# Altium PCB Ultrasonic_Localisation_backup_v1.PcbDoc
Units mm, origin at the board's own origin, x right, y up, seen from the top; angles counter-clockwise.
Board outline 29 x 59 mm, 4 copper layers (Top Layer, MidLayer1, GroundPlane, Bottom Layer); 50 components, 44 nets, 303 pads, 43 vias.
Unrouted connection lines stored in the file: 3.
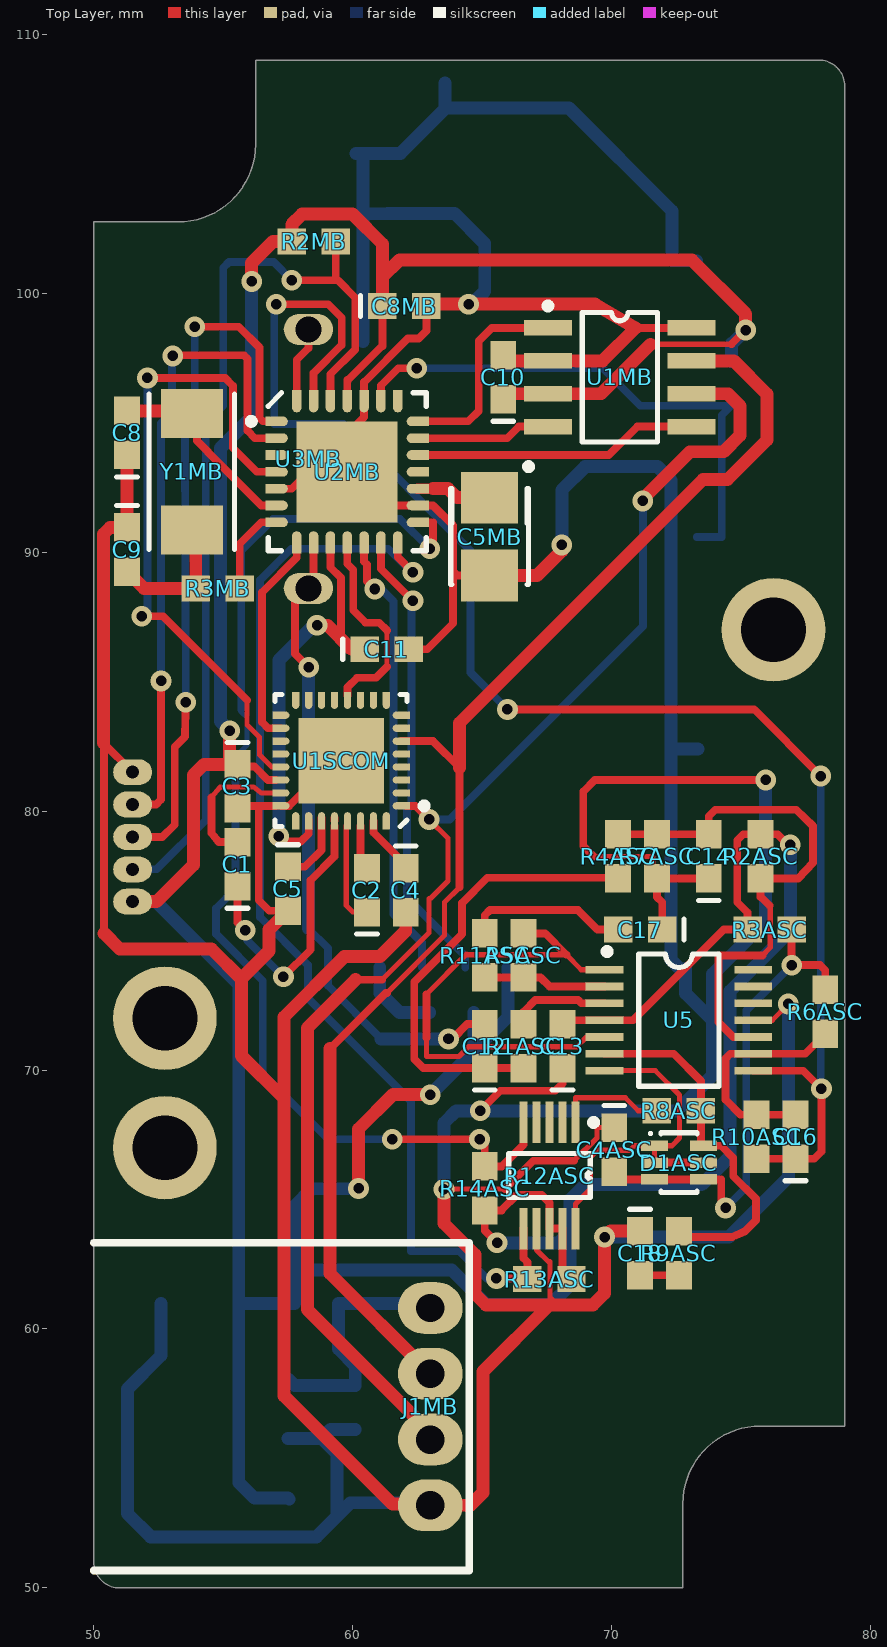
[diagram p0: Top Layer view]
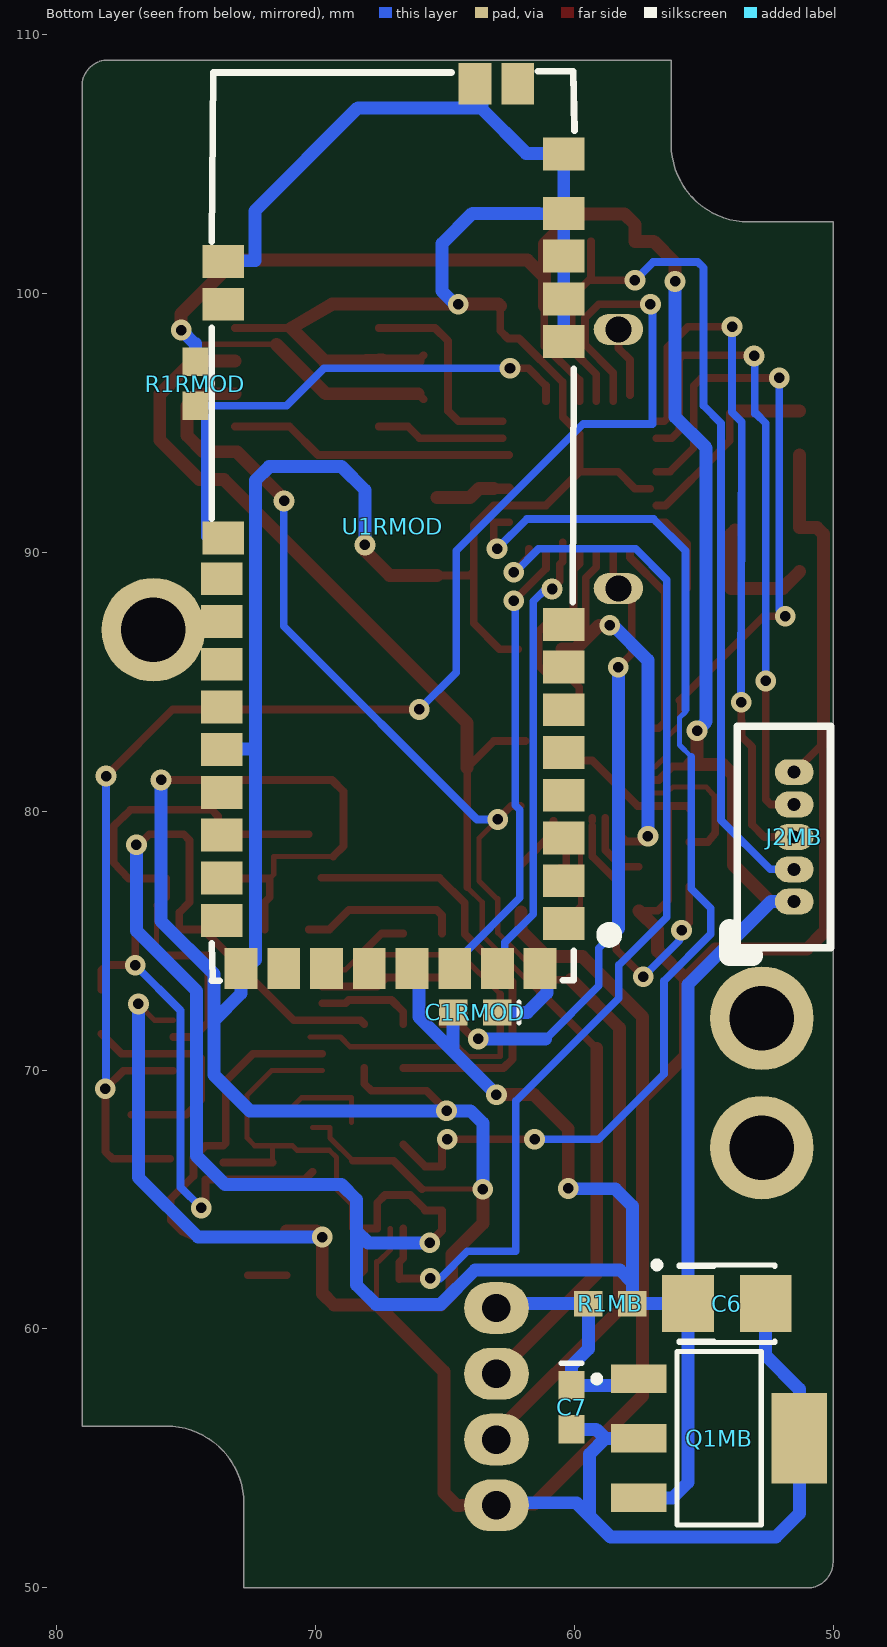
[diagram p1: Bottom Layer view, seen from below]
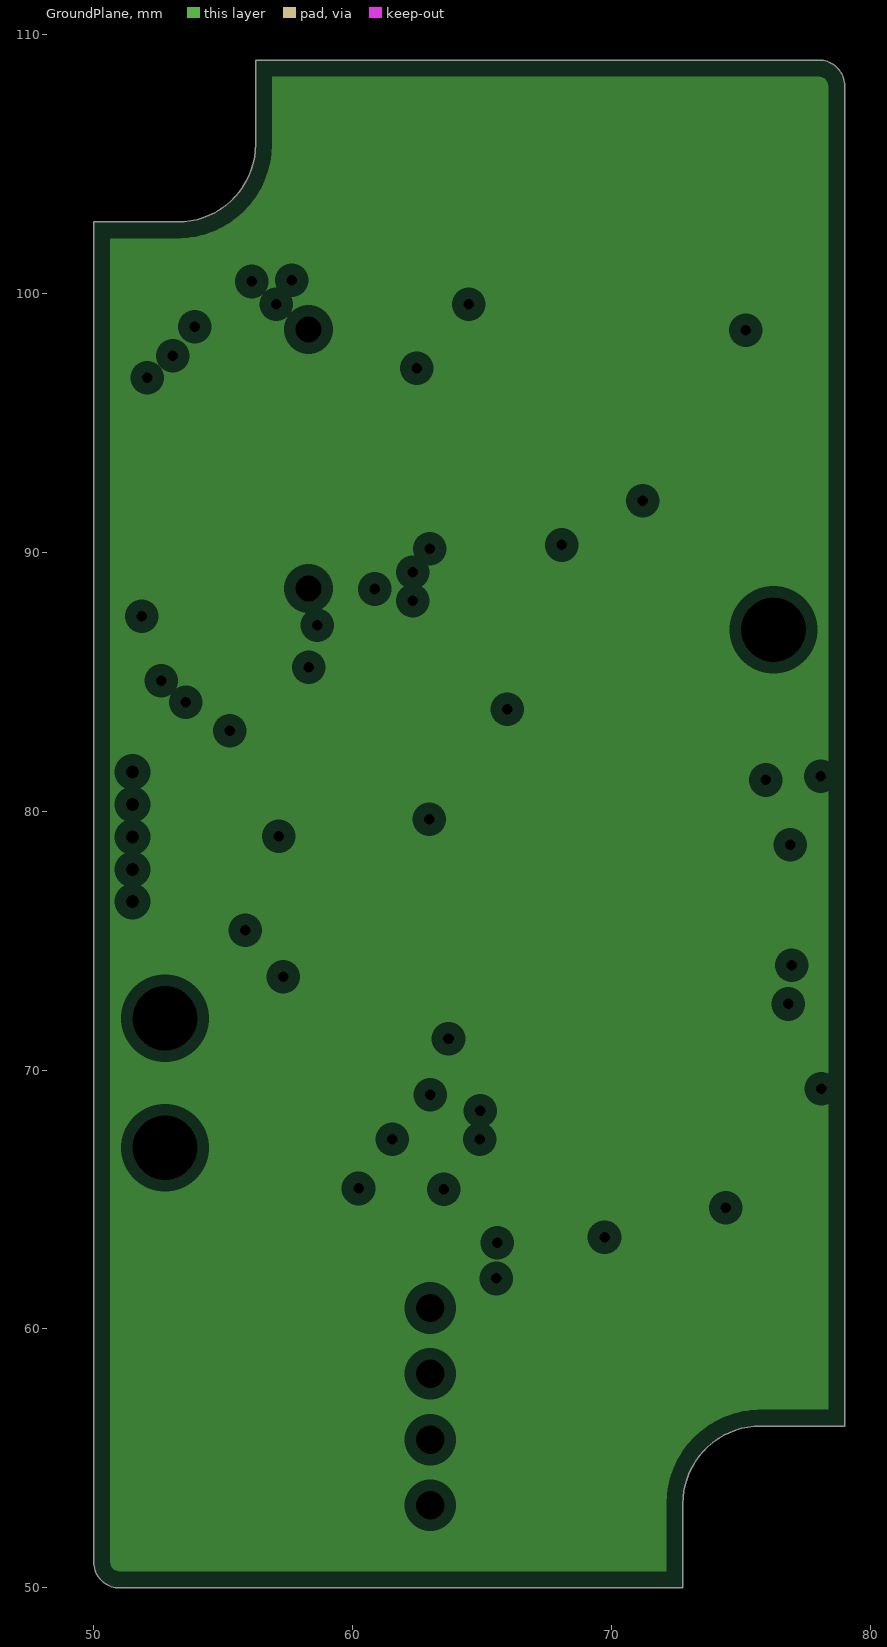
[diagram p2: GroundPlane, clearances drawn from the general rule]

## Layer stack, top to bottom
Top Layer: signal copper 0.036
Dielectric: prepreg 0.32, FR-4, Dk 4.8
MidLayer1: signal copper 0.036
Dielectric: core 0.32, FR-4, Dk 4.8
GroundPlane: plane copper 0.036
Dielectric: prepreg 0.32, FR-4, Dk 4.8
Bottom Layer: signal copper 0.036

## Board outline
50,51 50,102.75 53.25,102.75 ccw(c53.25,105.75) 56.25,105.75 56.25,109 78,109 cw(c78,108) 79,108 79,56.25 75.75,56.25 ccw(c75.75,53.25) 72.75,53.25 72.75,50 51,50 cw(c51,51)

## Design rules (kind name [scope] priority, off if disabled: settings)
Clearance [All] p1: gap=0.152
ComponentClearance [All] p1 off: gap=0.254 collisioncheckmode=3 verticalgap=0.254
HoleSize [All] p1: absolutevalues=TRUE maxlimit=4 minlimit=0.2 maxpercent=80.000 minpercent=20.000
PlaneClearance [All] p1: clearance=0.445
PlaneConnect [All] p1: planeconnectstyle=Direct reliefexpansion=0.508 reliefentries=4 reliefconductorwidth=0.254 reliefairgap=0.254
PolygonConnect [All] p1: connectstyle=Direct reliefconductorwidth=0.254 reliefentries=4 polygonreliefangle="90 Angle"
RoomDefinition S2 [InComponentClass('S2')] p1: confinementstyle=ConfineIn formatcopy=TRUE lockcomponents=FALSE outline 63.55,87.45 53.05,87.45 53.05,72.45 63.55,72.45
RoomDefinition Ultrasonic_Localisation [InComponentClass('Ultrasonic_Localisation')] p2: confinementstyle=ConfineIn formatcopy=TRUE lockcomponents=FALSE outline 47.9,48.25 77.375,48.25 77.375,109.4 47.9,109.4
RoomDefinition S3 [InComponentClass('S3')] p3: confinementstyle=ConfineIn formatcopy=TRUE lockcomponents=FALSE outline 76.625,70.5 57.125,70.5 57.125,111 76.625,111
RoomDefinition S1 [InComponentClass('S1')] p4: confinementstyle=ConfineIn formatcopy=TRUE lockcomponents=FALSE outline 62.375,60.4 78.9,60.4 78.9,80.425 62.375,80.425
RoutingVias [All] p1: holewidth=0.2 width=0.65 viastyle="Through Hole" minholewidth=0.2 minwidth=0.65 maxholewidth=1.5 maxwidth=2.1
ShortCircuit ShortCircuit_Unconnected_Pins [IsPad and not InnetClass('All') vs IsPad and not InnetClass('All')] p1: allowed=TRUE
ShortCircuit [All] p2: allowed=FALSE
SolderMaskExpansion [All] p1: expansion=0.075
TestPointUsage [All] p1: valid=0 allowmultiple=FALSE
Testpoint [All] p1: side=15 testpointundercomponent=TRUE minsize=1.016 maxsize=2.54 preferedsize=1.524 minholesize=0 maxholesize=1.016 preferedholesize=0.813 testpointgrid=0.025 style=1023 order=0123456789
Width [All] p1: maxlimit=3 minlimit=0.152 preferedwidth=0.3 minimp=50.000000 maximp=50.000000 favimp=50.000000
14 further rules are at their usual default settings.

## Classes and differential pairs
component class S3: C1RMOD R1RMOD U1RMOD
component class Ultrasonic_Localisation: C5MB C6 C7 C8 C8MB C9 C10 C11 J1 J1MB J2 J2MB Q1 Q1MB R1 R1MB R2 R2MB R3 R3MB U1 U1MB U2 U2MB U3MB U4 Y1 Y1MB
component class S2: C1 C2 C3 C4 C5 U1SCOM U6
component class S1: C4ASC C12 C13 C14 C15 C16 C17 C18 D1 D1ASC R1ASC R2ASC R3ASC R4 R4ASC R5 R5ASC R6 R6ASC R7 R7ASC R8 R8ASC R9 R9ASC R10 R10ASC R11 R11ASC R12 R12ASC R13 R13ASC R14 R14ASC U5

## Components (designator, comment, footprint, x,y, rotation, side; value= is the part's Value field where it differs from the comment)
C1 "UMK107BJ104KA-T" CC1608-0603 55.55,77.95 r90 top (schematic designator C1SCOM)
C1RMOD "Cap" CC1608-0603 63.825,72.225 r0 bottom
C2 "UMK107BJ104KA-T" CC1608-0603 60.55,76.95 r90 top (schematic designator C2SCOM)
C3 "UMK107BJ104KA-T" CC1608-0603 55.55,80.95 r270 top (schematic designator C3SCOM)
C4 "UMK107BJ104KA-T" CC1608-0603 62.05,76.95 r270 top (schematic designator C4SCOM)
C4ASC "Cap" CC1608-0603 70.1,66.925 r270 top
C5 "UMK107BJ104KA-T" CC1608-0603 57.5,77 r270 top (schematic designator C5SCOM)
C5MB "TPSB106K016R0800" TC3528-1411 65.29,90.6 r270 top
C6 "TPSB106K016R0800" TC3528-1411 54.1,60.975 r180 bottom (schematic designator C1MB)
C7 "UMK107BJ104KA-T" CC1608-0603 60.1,56.975 r270 bottom (schematic designator C2MB)
C8 "Cap" CC1608-0603 51.29,94.6 r90 top (schematic designator C5MB)
C8MB "UMK107BJ104KA-T" CC1608-0603 62,99.5 r0 top
C9 "Cap" CC1608-0603 51.29,90.1 r270 top (schematic designator C6MB)
C10 "UMK107BJ104KA-T" CC1608-0603 65.815,96.75 r90 top (schematic designator C3MB)
C11 "UMK107BJ104KA-T" CC1608-0603 61.315,86.25 r0 top (schematic designator C4MB)
C12 "Cap" CC1608-0603 65.1,70.925 r90 top (schematic designator C1ASC)
C13 "Cap" CC1608-0603 68.1,70.925 r90 top (schematic designator C2ASC)
C14 "Cap" CC1608-0603 73.75,78.25 r90 top (schematic designator C3ASC)
C16 "Cap" CC1608-0603 77.1,67.425 r90 top (schematic designator C5ASC)
C17 "Cap" CC1608-0603 71.1,75.425 r180 top (schematic designator C6ASC)
C18 "Cap" CC1608-0603 71.1,62.925 r270 top (schematic designator C7ASC)
D1ASC "BAV99DW-7-F" SOT-323-6L 72.6,66.425 r270 top
J1MB "70553-0003" CON_CAN_Device-4 63,57 r270 top
J2MB "53048-0510" CON_ISP 51.5,79 r90 bottom
Q1MB "MIC5201-5.0YS" DSO-G3 54.4,55.775 r270 bottom
R1ASC "Res" CR1608-0603 66.6,70.925 r270 top
R1MB "Res" CR1608-0603 58.6,60.975 r0 bottom
R1RMOD "Res" CR1608-0603 74.625,96.5 r90 bottom
R2ASC "Res" CR1608-0603 75.75,78.25 r90 top
R2MB "Res" CR1608-0603 58.5,102 r180 top
R3ASC "Res" CR1608-0603 76.1,75.425 r180 top
R3MB "Res" CR1608-0603 54.79,88.6 r180 top
R4ASC "Res" CR1608-0603 70.25,78.25 r90 top
R5ASC "Res" CR1608-0603 66.6,74.425 r270 top
R6ASC "Res" CR1608-0603 78.25,72.25 r90 top
R7ASC "Res" CR1608-0603 71.75,78.25 r90 top
R8ASC "Res" CR1608-0603 72.6,68.425 r180 top
R9ASC "Res" CR1608-0603 72.6,62.925 r90 top
R10ASC "Res" CR1608-0603 75.6,67.425 r90 top
R11ASC "Res" CR1608-0603 65.1,74.425 r90 top
R12ASC "AD5161" TSSO3x5-G10 67.6,65.925 r180 top
R13ASC "Res" CR1608-0603 67.6,61.925 r0 top
R14ASC "Res" CR1608-0603 65.1,65.425 r90 top
U1MB "p" SO-G8/E2.9 70.315,96.75 r270 top
U1RMOD "nanoLOC AVR Module" nano_LOC_AVR_Module35x14 67,91 r90 bottom
U1SCOM "p" QFN5X5-32 59.55,81.95 r90 top
U2MB "dsPIC33FJ128GP802" QFN6X6-28 59.79,93.1 r270 top
U3MB "MAXBOTIX_SENSOR" "Maxbotix Sensor" 58.29,93.6 r90 top
U5 "LMV324IPWR" TSSO5x6-G14/X.3 72.6,71.925 r270 top (schematic designator U1ASC)
Y1MB "CS10-16.000MABJ-UT" CS10 53.79,93.1 r270 top

## Footprints (in the part's own frame and the unit in brackets; to place one, negate y for a bottom-side part, rotate by r counter-clockwise, add the part's x,y. Pads: shape width x height; smd on the part's side, far side on the other; paste and mask are expansions set on the pad)
CC1608-0603 [mm] "Chip Capacitor; Body 1.6 x 0.8 mm (LxW typ)"
  rect 1.1x1 smd: 1(-0.85,0) 2(0.85,0)
  silkscreen extent -1.7,-0.4 -1.7,0.4
CON_CAN_Device-4 [mm] "4-pin CAN connector - device side"
  oval 2x2.5 hole 1.1: 1(-3.81,0) 2(-1.27,0) 3(1.27,0) 4(3.81,0)
  silkscreen extent -6.33,-13 6.33,1.5
CON_ISP [mm] "Microchip ISP Connector"
  oval 1x1.5 hole 0.5: 1(-2.5,0) 2(-1.25,0) 3(0,0) 4(1.25,0) 5(2.5,0)
  silkscreen extent -4.57,-1.4 4.28,2.5
CR1608-0603 [mm] "Chip Resistor; Body 1.6 x 0.8 mm (LxW typ)"
  rect 1.1x1 smd: 1(-0.85,0) 2(0.85,0)
CS10 [mm] "Crystal"
  rect 1.9x2.4 smd: 1(-2.25,0) 2(2.25,0)
  silkscreen extent -3,-1.65 3,1.65
DSO-G3 [mm] "SOT-223/SC-73; 4 Leads; Body 6.7 x 7.3 mm, inc. leads (LxW max)"
  rect 1.1x2.15 smd: 1(-2.3,-3.1) 2(0,-3.1) 3(2.3,-3.1)
  rect 3.5x2.15 smd: 4(0,3.1)
  silkscreen extent -3.35,-4.85 3.35,1.62
"Maxbotix Sensor" [mm] "Maxbotix Ultrasonic Sensor"
  oval 1.2x1.905 hole 1: 1(-5,0) 2(5,0)
nano_LOC_AVR_Module35x14 [mm] "Footprint for the nano_LOC_AVR_Module"
  round 0.8 on Mech1: 1(-15.37,-1.86) 2(-14.1,-1.86) 3(-14.1,-3.13) 4(-14.1,-4.4) 5(-15.37,-4.4) 6(-15.37,-3.13) 7(-9.5,1.74) 8(-8.23,1.74) 9(-8.23,0.47) 10(-8.23,-0.8) 11(-9.5,-0.8) 12(-9.5,0.47)
  rect 1.27x1.6 smd: 1(-15.34,-6.6) 2(-13.69,-6.6) 3(-12.04,-6.6) 4(-10.39,-6.6) 5(-8.74,-6.6) 6(-7.09,-6.6) 7(-5.44,-6.6) 8(-3.79,-6.6) 10(7.13,-6.6) 11(8.78,-6.6) 12(10.43,-6.6) 13(12.08,-6.6) 14(14.37,-6.6) 17(10.22,6.55) 18(8.57,6.55) 19(-0.45,6.55) 20(-2.03,6.6) 21(-3.68,6.6) 22(-5.33,6.6) 23(-6.98,6.6) 24(-8.63,6.6) 25(-10.28,6.6) 26(-11.93,6.6) 27(-13.58,6.6) 28(-15.23,6.6)
  rect 1.6x1.27 smd: 15(17.08,-4.825) 16(17.08,-3.175) 29(-17.08,5.86) 30(-17.08,4.21) 31(-17.08,2.56) 32(-17.08,0.91) 33(-17.08,-0.74) 34(-17.08,-2.39) 35(-17.08,-4.04) 36(-17.08,-5.69)
  silkscreen extent -17.55,-8.61 17.57,6.99
QFN5X5-32 [mm] "Quad Flat No Lead; 32 Terminals; Body 5 x 5 mm; Pitch 0.5 mm"
  rect 0.28x0.28 smd: 1(-1.75,-2.515) 2(-1.25,-2.515) 3(-0.75,-2.515) 4(-0.25,-2.515) 5(0.25,-2.515) 6(0.75,-2.515) 7(1.25,-2.515) 8(1.75,-2.515) 9(2.515,-1.75) 10(2.515,-1.25) 11(2.515,-0.75) 12(2.515,-0.25) 13(2.515,0.25) 14(2.515,0.75) 15(2.515,1.25) 16(2.515,1.75) 17(1.75,2.515) 18(1.25,2.515) 19(0.75,2.515) 20(0.25,2.515) 21(-0.25,2.515) 22(-0.75,2.515) 23(-1.25,2.515) 24(-1.75,2.515) 25(-2.515,1.75) 26(-2.515,1.25) 27(-2.515,0.75) 28(-2.515,0.25) 29(-2.515,-0.25) 30(-2.515,-0.75) 31(-2.515,-1.25) 32(-2.515,-1.75)
  oval 0.28x0.66 smd: 1(-1.75,-2.325) 2(-1.25,-2.325) 3(-0.75,-2.325) 4(-0.25,-2.325) 5(0.25,-2.325) 6(0.75,-2.325) 7(1.25,-2.325) 8(1.75,-2.325) 17(1.75,2.325) 18(1.25,2.325) 19(0.75,2.325) 20(0.25,2.325) 21(-0.25,2.325) 22(-0.75,2.325) 23(-1.25,2.325) 24(-1.75,2.325)
  oval 0.66x0.28 smd: 9(2.325,-1.75) 10(2.325,-1.25) 11(2.325,-0.75) 12(2.325,-0.25) 13(2.325,0.25) 14(2.325,0.75) 15(2.325,1.25) 16(2.325,1.75) 25(-2.325,1.75) 26(-2.325,1.25) 27(-2.325,0.75) 28(-2.325,0.25) 29(-2.325,-0.25) 30(-2.325,-0.75) 31(-2.325,-1.25) 32(-2.325,-1.75)
  rect 3.3x3.3 smd: 33(0,0)
  silkscreen extent -2.55,-3.33 2.55,2.55
QFN6X6-28 [mm] "Quad Flat No Lead, Plastic, Punch; 28 Terminals; Body 6 x 6 mm; Pitch 0.65 mm"
  oval 0.37x0.86 smd: 1(-1.95,-2.725) 2(-1.3,-2.725) 3(-0.65,-2.725) 4(0,-2.725) 5(0.65,-2.725) 6(1.3,-2.725) 7(1.95,-2.725) 15(1.95,2.725) 16(1.3,2.725) 17(0.65,2.725) 18(0,2.725) 19(-0.65,2.725) 20(-1.3,2.725) 21(-1.95,2.725)
  rect 0.37x0.37 smd: 1(-1.95,-2.97) 2(-1.3,-2.97) 3(-0.65,-2.97) 4(0,-2.97) 5(0.65,-2.97) 6(1.3,-2.97) 7(1.95,-2.97) 8(2.97,-1.95) 9(2.97,-1.3) 10(2.97,-0.65) 11(2.97,0) 12(2.97,0.65) 13(2.97,1.3) 14(2.97,1.95) 15(1.95,2.97) 16(1.3,2.97) 17(0.65,2.97) 18(0,2.97) 19(-0.65,2.97) 20(-1.3,2.97) 21(-1.95,2.97) 22(-2.97,1.95) 23(-2.97,1.3) 24(-2.97,0.65) 25(-2.97,0) 26(-2.97,-0.65) 27(-2.97,-1.3) 28(-2.97,-1.95)
  oval 0.86x0.37 smd: 8(2.725,-1.95) 9(2.725,-1.3) 10(2.725,-0.65) 11(2.725,0) 12(2.725,0.65) 13(2.725,1.3) 14(2.725,1.95) 22(-2.725,1.95) 23(-2.725,1.3) 24(-2.725,0.65) 25(-2.725,0) 26(-2.725,-0.65) 27(-2.725,-1.3) 28(-2.725,-1.95)
  rect 3.9x3.9 smd: 29(0,0)
  silkscreen extent -3.05,-3.83 3.05,3.05
SO-G8/E2.9 [mm] "Small Outline; 8 Leads; Body Width 3.9 mm; Pitch 1.27 mm"
  rect 0.6x1.85 smd: 1(-1.905,-2.775) 2(-0.635,-2.775) 3(0.635,-2.775) 4(1.905,-2.775) 5(1.905,2.775) 6(0.635,2.775) 7(-0.635,2.775) 8(-1.905,2.775)
  silkscreen extent -2.88,-2.9 2.5,1.45
SOT-323-6L [mm] "SOT-323-6L"
  rect 0.4x1.05 smd: 1(-0.65,-0.95) 2(0,-0.95) 3(0.65,-0.95) 4(0.65,0.95) 5(0,0.95) 6(-0.65,0.95)
  silkscreen extent -1.17,-1.15 1.15,0.7
TC3528-1411 [mm] "Capacitor, SM Tantalum; Body 3.5 x 2.8 mm (LxW typ)"
  rect 2x2.2 smd: 1(-1.5,0) 2(1.5,0)
  silkscreen extent -2.82,-1.5 1.85,1.63
TSSO3x5-G10 [mm] "Shrink Small Outline; 10 Leads; Body Width 3 mm; Pitch 0.5 mm"
  rect 0.3x1.6 smd: 1(-1,-2.05) 2(-0.5,-2.05) 3(0,-2.05) 4(0.5,-2.05) 5(1,-2.05) 6(1,2.05) 7(0.5,2.05) 8(0,2.05) 9(-0.5,2.05) 10(-1,2.05)
  silkscreen extent -1.83,-2.17 1.57,0.85
TSSO5x6-G14/X.3 [mm] "Shrink Small Outline; 14 Leads; Body Width 4.4 mm; Pitch 0.65 mm"
  rect 0.3x1.45 smd: 1(-1.95,-2.875) 2(-1.3,-2.875) 3(-0.65,-2.875) 4(0,-2.875) 5(0.65,-2.875) 6(1.3,-2.875) 7(1.95,-2.875) 8(1.95,2.875) 9(1.3,2.875) 10(0.65,2.875) 11(0,2.875) 12(-0.65,2.875) 13(-1.3,2.875) 14(-1.95,2.875)
  silkscreen extent -2.77,-2.9 2.55,1.55

## Part data
C1 C2 C3 C4 C5 C7 C8MB C10 C11: library part Cap, "Capacitor"
C1RMOD C4ASC C8 C9 C12 C13 C14 C16 C17 C18: "Capacitor"
C5MB C6: library part "Cap Pol", "Polarized Capacitor (Surface Mount)"
D1ASC: library part BAV99DW, "Quad surface mount switching diode array"
J1MB: library part CON_CAN_DEVICE, "4 pin CAN Connector 2.54mm pitch"
J2MB: library part CON_ISP_Header_5p_1.25mm_horizontal, "6 pin header - 1.25mm pitch horizontal"
Q1MB: "5V LDO 200mA"
R1ASC R1MB R1RMOD R2ASC R2MB R3ASC R3MB R4ASC R5ASC R6ASC R7ASC R8ASC R9ASC R10ASC R11ASC R13ASC R14ASC: "Resistor"
R12ASC: library part AD5161_3x5, "AD5161 SPI/I2C Selectable Digital Potentiometer"
U1MB: library part SN65HVD234D, "3.3V CAN Transceiver"
U1RMOD: "Radio Transceiver and Localisation module"
U1SCOM: library part MAX3243E_SMALL, "RS232 Transceiver"
U2MB: "dsPIC33FJ128GP802 with 2 UART's"
U3MB: "Maxbotix Ultrasonic Sensor"
U5: "Rail-to-Rail Operational Amplifier"
Y1MB: library part CS10, "Crystal Oscillator"

## Free pads (board coordinates)
  round 4 hole 2.5: 0(52.75,67) 0(52.75,72) 0(76.25,87)

## Via types
v1: diameter 0.8, hole 0.406, Top Layer to Bottom Layer, 43 vias

## Nets (pads, with @x,y where several pads share a name; then routed paths per layer and width w, separated by ;. In a path a pad name is that pad's centre, name@x,y a point inside that pad or via, vN(x,y) a via of type N, cw(c..) or ccw(c..) an arc to the next point about the centre after c; other vN are vias at no path point)
A: R8ASC.2 R12ASC.1 | length 4.3
  Top Layer w0.2: R12ASC.1 68.6,68.928 70.527,68.928 71.029,68.425 R8ASC.2
CAN_EN: U1MB.5 U2MB.19 | length 11
  Top Layer w0.3: U2MB.19@62.515,93.75 69.89,93.75 70.985,94.845 U1MB.5
CAN_RX: U1MB.4 U2MB.20 | length 5
  Top Layer w0.3: U2MB.20@62.76,94.4 65.965,94.4 66.41,94.845 U1MB.4
CAN_TX: U1MB.1 U2MB.21 | length 7.9
  Top Layer w0.3: U2MB.21@62.76,95.05 64.465,95.05 64.865,95.45 64.865,98.15 65.37,98.655 U1MB.1
CANH/UART_TX: J1MB.2 U1MB.7 U1SCOM.6 | length 53.1
  Top Layer w0.2: 61.325,72.975 63.55,75.201 63.55,76.475 64.128,77.053
  Top Layer w0.3: 59.125,70.825 61.275,72.975 61.325,72.975 ; U1SCOM.6@61.875,82.7 63.1,82.7 64.128,81.672 64.128,77.053
  Top Layer w0.5: 59.125,70.825 59.125,62.145 J1MB.2 ; 64.128,81.672 64.128,83.403 73.525,92.8 74.475,92.8 76,94.325 76,96.1 74.715,97.385 U1MB.7
CANL/UART_RX: J1MB.3 U1MB.6 U1SCOM.1 | length 54.3
  Top Layer w0.2: 61.137,73.487 62.95,75.3 62.95,76.625 63,76.625 63.675,77.3 63.675,78.95 v1(62.95,79.675)
  Top Layer w0.3: 60.112,73.487 61.137,73.487 ; U1SCOM.1@62.065,80.2 62.425,80.2 v1(62.95,79.675)
  Top Layer w0.5: 60.112,73.487 58.25,71.626 58.25,60.75 J1MB.3@63.1,55.9 ; v1@71.125,91.975 73.025,93.875 74.325,93.875 74.95,94.5 74.95,95.65 74.485,96.115 U1MB.6
  Bottom Layer w0.3: v1(62.95,79.675) 63.75,79.675 71.212,87.137 71.212,91.701 v1(71.2,91.975)
DIG_IP_1: C12.2 U2MB.9 U3MB.1 | length 24.6
  Top Layer w0.3: v1(58.3,85.55) 57.775,86.075 57.775,88.085 58.49,88.8 U2MB.9@58.49,90.13 ; v1@63.853,71.2 64.428,71.775 C12.2
  Bottom Layer w0.3: 58.29,75.46 59.05,74.7 59.05,73.25 61.1,71.2
  Bottom Layer w0.5: 58.29,75.46 v1@58.29,85.44 ; 61.1,71.2 v1(63.7,71.2)
DIG_IP_2: U2MB.28 U3MB.2 | length 2.7
  Top Layer w0.3: U2MB.28@57.84,96.07 57.84,97.425 58.29,97.875 U3MB.2
GND: C1RMOD.1 C3.2 C4.2 C4ASC.1 C5.2 C5MB.2 C6.2 C7.2 C8.1 C8MB.2 C9.1 C10.2 C11.2 C13.1 C14.1 C17.1 C18.1 J1MB.4 J2MB.5 Q1MB.2 Q1MB.4 R7ASC.1 R12ASC.7 U1MB.2 U1MB.8 U1RMOD.5@60.4,82.26 U1RMOD.10@60.4,98.13 U1RMOD.11@60.4,99.78 U1RMOD.12@60.4,101.43 U1RMOD.13 U1RMOD.14 U1RMOD.16 U1RMOD.17 U1RMOD.24 U1RMOD.29 U1RMOD.36 U1SCOM.24 U1SCOM.33 U2MB.5 U2MB.16 U2MB.24 U2MB.29 U5.11 | length 309.2
  Top Layer w0.2: v1(63.525,65.4) 64.45,65.4 65.875,65.4 ; R12ASC.7 67.1,63.05 67.55,62.6 67.625,62.6 67.625,61.225 67.925,60.925 ; 68.55,66.5 69.43,67.38 69.43,67.775 C4ASC.1 ; 69.3,78.25 71.6,78.25 71.6,77.55 R7ASC.1 ; U5.11 76.2,71.925 v1(76.825,72.55)
  Top Layer w0.3: 50.377,82.623 J2MB.5 ; 50.401,75.278 50.401,82.599 ; C3.2 55.55,80.2 U1SCOM.24@57.035,80.2 ; 56.369,80.2 56.369,76.556 56.775,76.15 C5.2 ; U2MB.5@57.065,92.45 57.65,92.45 58.3,93.1 U2MB.29 ; U1SCOM.24@57.225,80.2 57.549,80.2 59.299,81.95 U1SCOM.33 ; C11.2 62.878,86.25 63.878,87.25 63.878,91.025 63.103,91.8 61.09,91.8 U2MB.29 ; C8MB.2 62.85,98.55 62.55,98.25 62.125,98.25 60.44,96.565 60.44,95.215 59.79,94.565 U2MB.29 ; 63.878,89.25 64.028,89.1 C5MB.2 ; v1(64.925,68.425) 65.7,69.2 67.825,69.2 68.1,69.475 C13.1 ; C10.2 C10.2@66.03,97.385 ; 65.875,65.4 66.975,66.5 68.55,66.5 ; U1MB.2@67.39,97.425 U1MB.2@67.541,97.42 ; 69.3,78.25 68.9,78.65 68.9,80.75 69.35,81.2 v1(75.95,81.2) ; 70.92,98.655 U1MB.8 ; C17.1 71.95,76.478 71.75,76.678 R7ASC.1 C14.1
  Top Layer w0.5: 50.377,82.623 50.377,90.7 50.627,90.95 C9.1 C8.1 ; 50.401,75.278 51.004,74.675 54.55,74.675 55.7,73.525 ; 57.35,68.9 55.7,70.55 55.7,73.525 ; C5.2 56.775,75.425 56.775,74.6 55.7,73.525 ; C4.2 62.05,75.375 61.05,74.375 59.675,74.375 57.35,72.05 57.35,57.418 61.534,53.234 62.956,53.234 63.001,53.233 64.403,53.19 64.54,53.19 65.025,53.675 65.025,58.35 67.6,60.925 ; C8MB.2 62.925,99.575 69.35,99.575 70.92,98.655 69.65,97.385 68.628,97.385 67.541,97.42 U1MB.2@67.39,97.425 ; v1(63.525,65.4) 63.525,64.075 64.725,62.875 64.725,61.35 65.15,60.925 69.275,60.925 69.725,61.375 v1(69.725,63.55) 69.95,63.775 C18.1 ; C5MB.2 67.125,89.1 68.075,90.05 v1(68.075,90.275) ; C10.2@66.03,97.385 U1MB.2
  Bottom Layer w0.5: C6.2 52.6,58.975 51.3,57.675 51.3,52.875 52.2,51.975 58.6,51.975 59.915,53.29 J1MB.4@62.79,53.29 ; Q1MB.2 58.8,55.775 ; 59.4,52.775 59.4,55.175 58.8,55.775 ; C7.2 59.15,56.125 58.8,55.775 ; U1RMOD.14@60.135,105.4 61.85,105.4 63.56,107.11 U1RMOD.16@63.56,108.11 ; U1RMOD.10@60.4,98.13 U1RMOD.14 ; U1RMOD.13@60.401,103.05 61.353,103.08 63.93,103.08 65.1,101.91 65.1,100.075 64.6,99.575 v1(64.475,99.575) ; U1RMOD.36@61.045,73.95 61.045,72.98 61.8,72.225 C1RMOD.1 ; v1(63.525,65.4) 63.525,67.95 64,68.425 72.525,68.425 73.9,69.8 73.9,73.7 75.95,75.75 v1(75.95,81.2) ; 63.56,107.156 68.349,107.156 72.33,103.175 72.33,101.25 U1RMOD.17@73.285,101.25 ; v1(68.075,90.275) 68.075,92.4 68.975,93.3 71.775,93.3 72.3,92.775 72.3,74.245 U1RMOD.29@72.595,73.95 ; v1(69.725,63.55) 74.525,63.55 76.825,65.85 v1(76.825,72.55) ; 72.3,82.275 72.38,82.355 72.38,82.4 U1RMOD.24@73.335,82.4 ; U1RMOD.29 72.86,72.954 73.9,71.914
M\C\L\R\: J2MB.2 R2MB.1 U2MB.26 | length 36.9
  Top Layer w0.3: v1(57.65,100.5) 59.425,100.5 59.35,100.575 R2MB.1 ; U2MB.26@59.14,95.825 59.14,96.865 60.1,97.825 60.1,99.825 59.45,100.475
  Bottom Layer w0.3: J2MB.2 52.425,77.75 54.325,79.65 54.325,94.975 55,95.65 55,100.975 55.225,101.2 56.95,101.2 v1(57.65,100.5)
NetC1_1: C1.1 U1SCOM.28 | length 11
  Top Layer w0.3: C1.1 55.55,75.7 v1(55.85,75.4) ; v1(57.325,73.6) 58.375,74.65 58.375,77.325 59.3,78.25 U1SCOM.28@59.3,79.435 ; U1SCOM.28@59.3,79.625 59.3,79.729 U1SCOM.28@59.3,79.625
  Bottom Layer w0.3: v1@55.9,75.35 55.937,75.35 55.937,74.988 v1(57.325,73.6)
NetC1_2: C1.2 U1SCOM.23 | length 5.3
  Top Layer w0.2: 54.55,80.525 54.884,80.918 56.175,80.925 56.475,80.7 U1SCOM.23@57.035,80.7
  Top Layer w0.3: 54.55,80.525 54.55,79.15 54.825,78.8 C1.2
NetC2_1: C2.1 U1SCOM.29 | length 4
  Top Layer w0.2: U1SCOM.29@59.751,79.435 59.751,76.349 60,76.1 C2.1
NetC2_2: C2.2 U1SCOM.30 | length 1.9
  Top Layer w0.3: U1SCOM.30@60.3,79.435 60.3,77.8 C2.2
NetC4_1: C4.1 U1SCOM.31 | length 2.2
  Top Layer w0.3: U1SCOM.31@60.8,79.625 60.8,79.175 C4.1@62.05,77.925
NetC4ASC_2: C4ASC.2 D1ASC.3 D1ASC.4 R3ASC.1 R6ASC.2 | length 20.7
  Top Layer w0.3: C4ASC.2 70.4,65.775 74.23,65.775 74.23,64.845 v1(74.4,64.675) ; R6ASC.2 78.25,73.85 78.05,74.05 v1(76.95,74.05) R3ASC.1 ; R3ASC.1 76.95,74.75 R3ASC.1
  Bottom Layer w0.3: v1(74.4,64.675) 75.2,65.475 75.2,72.269 ; 75.2,72.3 v1(76.95,74.05)
NetC5_1: C5.1 U1SCOM.27 | length 2.8
  Top Layer w0.3: C5.1 58.153,77.85 58.8,78.497 U1SCOM.27@58.8,79.729
NetC5MB_1: C5MB.1 U2MB.17 | length 2.9
  Top Layer w0.4: U2MB.17@62.515,92.45 63.103,92.45
  Top Layer w0.5: 63.103,92.45 63.678,92.45 64.028,92.1 C5MB.1
NetC7_1: C7.1 J1MB.1 Q1MB.1 R1MB.2 | length 9.5
  Bottom Layer w0.5: Q1MB.1 57.75,57.825 C7.1 60.1,58.575 59.45,59.225 R1MB.2 62.725,60.975 J1MB.1@62.79,60.91
NetC8_2: C8.2 U2MB.6 Y1MB.1 | length 7.7
  Top Layer w0.3: Y1MB.1 53.99,95.35 53.99,94.3 54.415,93.875 54.415,93.853 56.468,91.8 U2MB.6@56.82,91.8
  Top Layer w0.5: C8.2 53.69,95.45 Y1MB.1
NetC9_2: C9.2 R3MB.2 Y1MB.2 | length 5.2
  Top Layer w0.5: C9.2 51.94,88.6 R3MB.2 53.94,90.7 Y1MB.2
NetC12_1: C12.1 R1ASC.2 R4ASC.1 | length 17.1
  Top Layer w0.3: R1ASC.2 62.725,70.075 62.375,70.425 62.375,73.4 64.225,75.25 64.225,76.449 65.201,77.425 R4ASC.1@69.75,77.425
NetC14_2: C14.2 R2ASC.1 R4ASC.2 R7ASC.2 U5.10 | length 21.4
  Top Layer w0.2: 75.825,74.425 76.125,74.725 76.125,76.325 76.1,76.35
  Top Layer w0.3: R4ASC.2 C14.2 73.75,79.803 73.997,80.05 77.125,80.05 77.775,79.425 77.775,78 77.214,77.412 ; U5.10 74.7,71.275 74.125,71.85 74.125,74.425 75.825,74.425 ; 76.1,76.35 75.772,76.678 75.75,76.678 R2ASC.1 77.202,77.4
NetC16_2: C16.2 R6ASC.1 R10ASC.2 U5.9 | length 8.8
  Top Layer w0.3: C16.2 74.975,68.275 74.4,68.85 74.4,70.445 74.58,70.625 77.475,70.625 R6ASC.1
NetC17_2: C17.2 R11ASC.2 | length 6.2
  Top Layer w0.3: R11ASC.2 65.1,75.978 65.3,76.178 68.697,76.178 69.45,75.425 C17.2
NetC18_2: C18.2 R9ASC.1 | length 1.5
  Top Layer w0.3: C18.2 R9ASC.1
NetD1ASC_6: D1ASC.6 R8ASC.1 R9ASC.2 U5.6 | length 14
  Top Layer w0.3: U5.6 72.4,70.625 73.45,69.575 73.45,67.175 D1ASC.6 74.23,67.075 74.7,66.605 74.7,65.9 75.575,65.025 75.575,64.2 75.15,63.775 74.661,63.55 R9ASC.2@72.6,63.55
NetR1ASC_1: R1ASC.1 U5.3 | length 3.8
  Top Layer w0.3: R1ASC.1 66.6,72.25 67.053,72.703 68.701,72.703 68.829,72.575 U5.3
NetR3MB_1: R3MB.1 U2MB.7 | length 3.2
  Top Layer w0.3: R3MB.1 55.64,90.322 56.468,91.15 U2MB.7@56.82,91.15
NetR5ASC_1: R5ASC.1 U5.1 U5.5 | length 19.8
  Top Layer w0.2: 62.85,71.25 62.85,70.525 64.1,70.525 64.475,70.9 68.65,70.9 69.025,71.275 U5.5@70.2,71.275 ; 62.85,72.925 64.4,74.475 64.422,74.453 68.252,74.453 68.83,73.875 U5.1
  Top Layer w0.3: 62.85,71.25 62.85,72.925 ; R5ASC.1 67.43,75.275 68.252,74.453
NetR5ASC_2: R5ASC.2 R11ASC.1 U5.2 | length 4.8
  Top Layer w0.3: R11ASC.1 67.254,73.575 67.604,73.225 U5.2
NLOC_RX: U1RMOD.35 U2MB.12 | length 17.5
  Top Layer w0.3: U2MB.12@60.44,90.375 60.44,89.635 60.55,89.525 60.55,88.875 v1(60.85,88.575)
  Bottom Layer w0.3: v1(60.85,88.575) 61.1,88.575 61.578,88.097 61.578,76.021 62.674,74.924 U1RMOD.35@62.674,73.971
NLOC_TX: U1RMOD.34 U2MB.13 | length 17.6
  Top Layer w0.3: U2MB.13@61.09,90.13 61.09,89.36 v1(62.325,88.125)
  Bottom Layer w0.3: v1@62.275,88.075 62.275,80.225 62.1,80.05 62.1,76.65 64.345,74.405 U1RMOD.34@64.345,73.95
PGC: J2MB.4 U2MB.2 | length 25.2
  Top Layer w0.3: J2MB.4 52.403,80.25 52.575,80.422 ; 52.6,80.447 v1(52.6,85.025) ; v1@53.15,97.6 55.8,97.6 55.942,97.458 55.942,94.683 56.225,94.4 U2MB.2@56.82,94.4
  Bottom Layer w0.3: v1(52.6,85.025) 52.6,94.975 52.975,95.35 53.025,95.35 v1@53.025,97.625
  other v1: 53.05,97.575
PGD: J2MB.3 U2MB.1 | length 27.4
  Top Layer w0.3: J2MB.3 52.65,79 53.125,79.475 53.125,82.475 53.525,82.875 v1(53.55,84.2) ; v1(53.9,98.7) 55.6,98.7 56.4,97.9 56.4,95.175 56.525,95.05 U2MB.1@56.82,95.05
  Bottom Layer w0.3: v1(53.55,84.2) 53.525,95.025 53.9,95.4 v1(53.9,98.7) v1@53.938,98.667
RAD_R\S\T\: R1RMOD.1 U1RMOD.19 U2MB.23 | length 21.2
  Top Layer w0.3: U2MB.23@61.09,95.825 61.09,96.43 61.76,97.1 v1(62.475,97.1)
  Bottom Layer w0.3: v1(62.475,97.1) 69.658,97.1 71.108,95.65 R1RMOD.1 74.255,95.28 74.255,90.58 U1RMOD.19@73.285,90.58
SCL: R12ASC.6 R13ASC.1 U2MB.14 | length 43.2
  Top Layer w0.3: U2MB.14@61.74,90.13 61.74,89.81 v1(62.325,89.225) ; v1(65.55,61.95) 66.725,61.95 R13ASC.1 66.75,62.578 66.6,62.728 R12ASC.6
  Bottom Layer w0.3: v1(62.325,89.225) 62.275,89.225 61.375,90.125 57.625,90.125 56.425,88.925 56.425,75.9 58.275,74.05 58.275,72.775 62.25,68.8 62.25,63 64.125,63 65.175,61.95 v1(65.55,61.95)
SDA: R12ASC.5 R14ASC.2 U2MB.15 | length 43.9
  Top Layer w0.3: v1(61.525,67.325) v1(64.9,67.325) 65.1,67.125 R14ASC.2 65.754,66.275 66.6,67.121 ; U2MB.15@62.515,91.15 63.103,91.15 63.103,90.253 v1(62.975,90.125)
  Bottom Layer w0.2: 55.475,82.1 55.925,82.55 55.925,83.6 55.7,83.825 55.7,83.925
  Bottom Layer w0.3: 55.475,82.1 55.475,77 54.725,76.25 54.725,75.25 56.525,73.45 56.525,69.85 59.05,67.325 v1(61.525,67.325) ; 55.7,83.925 55.7,90.05 56.925,91.275 61.825,91.275 v1(62.975,90.125)
SNSR_OP: C16.1 R10ASC.1 U2MB.27 U5.8 | length 60.3
  Top Layer w0.3: v1(57.05,99.575) 59.05,99.575 59.575,99.05 59.575,98 58.49,96.915 U2MB.27@58.49,95.825 ; v1(65.975,83.925) 75.5,83.925 v1(78.075,81.35) ; U5.8 77.4,69.975 v1(78.1,69.275) 78.1,66.85 77.825,66.575 R10ASC.1
  Bottom Layer w0.3: v1(57.05,99.575) 56.975,99.5 56.975,94.95 59.65,94.95 64.55,90.05 64.55,85.35 v1(65.975,83.925) ; v1(78.075,81.35) 78.075,69.575 v1@78.1,69.55
U\A\R\T\_\E\N\: U1SCOM.21 U2MB.4 | length 25.7
  Top Layer w0.2: 55.925,84.275 55.925,83.325 56.4,82.85 56.4,82.175 56.875,81.7 U1SCOM.21@57.225,81.7
  Top Layer w0.3: v1(51.85,87.525) 52.675,87.525 55.925,84.275 ; v1(52.075,96.725) 55.075,96.725 55.375,96.425 55.375,94.025 56.3,93.1 U2MB.4@56.82,93.1
  Bottom Layer w0.3: v1(51.85,87.525) 52.075,87.75 v1(52.075,96.725)
USART/RX: U1SCOM.18 U2MB.8 | length 8.1
  Top Layer w0.3: U1SCOM.18@57.225,83.2 56.728,83.2 56.503,83.425 56.503,88.453 57.84,89.79 U2MB.8@57.84,90.13
USART/TX: U1SCOM.12 U2MB.11 | length 7.7
  Top Layer w0.2: 61.325,85.575 61.325,86.975
  Top Layer w0.3: U2MB.11@59.79,90.13 59.79,89.55 60.025,89.315 60.025,87.75 60.5,87.275 61.025,87.275 61.325,86.975 ; U1SCOM.12@59.8,84.465 59.8,84.779 60.171,85.15 60.9,85.15 61.325,85.575
VCC3V3: C1RMOD.2 C3.1 C6.1 C8MB.1 C10.1 C11.1 C13.2 J2MB.1 Q1MB.3 R1MB.1 R1RMOD.2 R2ASC.2 R2MB.2 R3ASC.2 R12ASC.8 R12ASC.9 R13ASC.2 R14ASC.1 U1MB.3 U1RMOD.33 U1SCOM.22 U1SCOM.26 U2MB.10 U2MB.25 U5.4 | length 197
  Top Layer w0.2: 71.5,98.025 74.625,98.025
  Top Layer w0.3: C3.1 55.625,81.725 56.201,81.725 56.726,81.2 U1SCOM.22@57.035,81.2 ; v1(57.15,79.025) 57.35,78.825 57.996,78.825 58.3,79.129 U1SCOM.26@58.3,79.625 ; U2MB.10@59.14,90.13 59.14,89.417 59.55,89.007 59.55,86.65 ; U2MB.25@59.79,95.825 59.79,96.65 59.825,96.65 61.125,97.95 61.15,97.95 C8MB.1 ; v1(65.575,63.325) 65.1,63.8 R14ASC.1 65.754,64.575 65.754,64.604 66.325,65.175 67.3,65.175 67.6,64.875 R12ASC.8 R12ASC.9 68.1,62.275 R13ASC.2 ; C10.1 C10.1@66.03,96.115 ; C13.2 68.25,71.925 70.825,71.925 74.325,75.425 R3ASC.2 75.25,76.078 74.85,76.478 74.85,78.87 75.08,79.1 76.405,79.1 76.805,78.7 v1(76.9,78.7) ; 74.625,98.025 v1(75.175,98.575)
  Top Layer w0.5: J2MB.1 52.425,76.5 53.85,77.925 53.85,81.4 54.25,81.8 C3.1 55.25,82.1 v1(55.25,83.1) ; v1(56.1,100.45) 56.1,101.172 56.928,102 R2MB.2 57.65,102.655 58.045,103.05 60,103.05 61.15,101.9 C8MB.1 ; v1(58.625,87.175) 59.025,87.175 59.95,86.25 C11.1 ; v1(60.225,65.425) 60.225,67.725 61.55,69.05 v1(63,69.05) ; 61.15,100.625 61.8,101.275 73.1,101.275 75.175,99.2 v1(75.175,98.575) ; C10.1@66.03,96.115 69.59,96.115 71.5,98.025
  Bottom Layer w0.3: v1@58.5,87.175 v1(58.625,87.175)
  Bottom Layer w0.5: J2MB.1 52.403,76.5 55.6,73.303 55.6,54.075 56.2,53.475 Q1MB.3 Q1MB.3@57.55,53.425 ; v1(55.25,83.1) 54.9,83.45 54.9,94.025 56.1,95.225 v1(56.1,100.45) ; C6.1 R1MB.1 57.75,64.75 58.4,65.4 v1(60.225,65.425) ; v1(57.15,79.025) 57.15,85.825 v1@58.5,87.175 ; 57.75,61.8 58.225,62.275 63.825,62.275 65.15,60.95 67.65,60.95 68.4,61.7 68.4,65 68.975,65.575 73.475,65.575 74.575,66.675 74.575,73.05 76.9,75.375 v1(76.9,78.7) ; v1(63,69.05) 65.995,72.045 U1RMOD.33@65.995,73.95 ; 64.675,70.725 C1RMOD.2 ; v1(65.575,63.325) 67.95,63.325 68.4,63.775 ; R1RMOD.2 74.625,98.055 74.655,98.055 v1(75.175,98.575)
W: D1ASC.1 D1ASC.2 D1ASC.5 R12ASC.10 U5.7 | length 14.2
  Top Layer w0.2: R12ASC.10 68.6,64.825 69.175,65.4 69.175,65.403 69.18,66.625 69.18,66.628 69.452,66.9 70.7,66.9 70.875,67.075 72.33,67.075 ; U5.7 71.682,69.975 72.625,69.032 72.625,67.37 72.33,67.075 ; D1ASC.2 D1ASC.1
  Top Layer w0.3: D1ASC.2 D1ASC.5
pads on no net: R12ASC.2 R12ASC.3 R12ASC.4 U1RMOD.1 U1RMOD.2 U1RMOD.3 U1RMOD.4 U1RMOD.5@62.6,75.63 U1RMOD.6 U1RMOD.7 U1RMOD.8 U1RMOD.9 U1RMOD.10@66.2,82.77 U1RMOD.11@66.2,81.5 U1RMOD.12@67.47,81.5 U1RMOD.15 U1RMOD.18 U1RMOD.20 U1RMOD.21 U1RMOD.22 U1RMOD.23 U1RMOD.25 U1RMOD.26 U1RMOD.27 U1RMOD.28 U1RMOD.30 U1RMOD.31 U1RMOD.32 U1SCOM.2 U1SCOM.3 U1SCOM.4 U1SCOM.5 U1SCOM.7 U1SCOM.8 U1SCOM.9 U1SCOM.10 U1SCOM.11 U1SCOM.13 U1SCOM.14 U1SCOM.15 U1SCOM.16 U1SCOM.17 U1SCOM.19 U1SCOM.20 U1SCOM.25 U1SCOM.32 U2MB.3 U2MB.18 U2MB.22 U5.12 U5.13 U5.14

## Polygon pours and split planes (outlines as drawn)
no net on GroundPlane (split plane): 78.137,108.332 78.254,108.254 78.332,108.137 78.356,108.017 78.353,108 78.353,56.897 75.75,56.897 75.74,56.895 75.18,56.851 74.623,56.718 74.095,56.499 73.607,56.2 73.172,55.828 72.8,55.393 72.501,54.905 72.282,54.377 72.149,53.82 72.105,53.26 72.103,53.25 72.103,50.647 51,50.647 50.983,50.644 50.863,50.668 50.746,50.746 50.668,50.863 50.644,50.983 50.647,51 50.647,102.103 53.25,102.103 53.26,102.105 53.82,102.149 54.377,102.282 54.905,102.501 55.393,102.8 55.828,103.172 56.2,103.607 56.499,104.095 56.718,104.623 56.851,105.18 56.895,105.74 56.897,105.75 56.897,108.353 78,108.353 78.017,108.356

## Silkscreen, mask and mechanical layers (free items; w line width, h text height)
Top Solder:
  circle w1: c53,56 r1.5
Bottom Solder:
  circle w1: c53,56 r1.5
Mechanical 16:
  lines w0.2: 50,102.75 50,51 ccw(c51,51) 51,50 72.75,50 72.75,53.25 cw(c75.75,53.25) 75.75,56.25 79,56.25 ; 53.25,102.75 ccw(c53.25,105.75) 56.25,105.75 56.25,109 78,109 cw(c78,108) 79,108 ; 79,56 79,107.75